# Altium PCB SensorBoard_PCB.PcbDoc (part 2 of 2)
Units mm, origin at the board's own origin, x right, y up, seen from the top; angles counter-clockwise.
Board outline 30.45 x 31.34 mm, 4 copper layers (Top Layer, GND, 3.3V, Bottom Layer), stack 1.561 mm thick; 41 components, 34 nets, 218 pads, 43 vias.
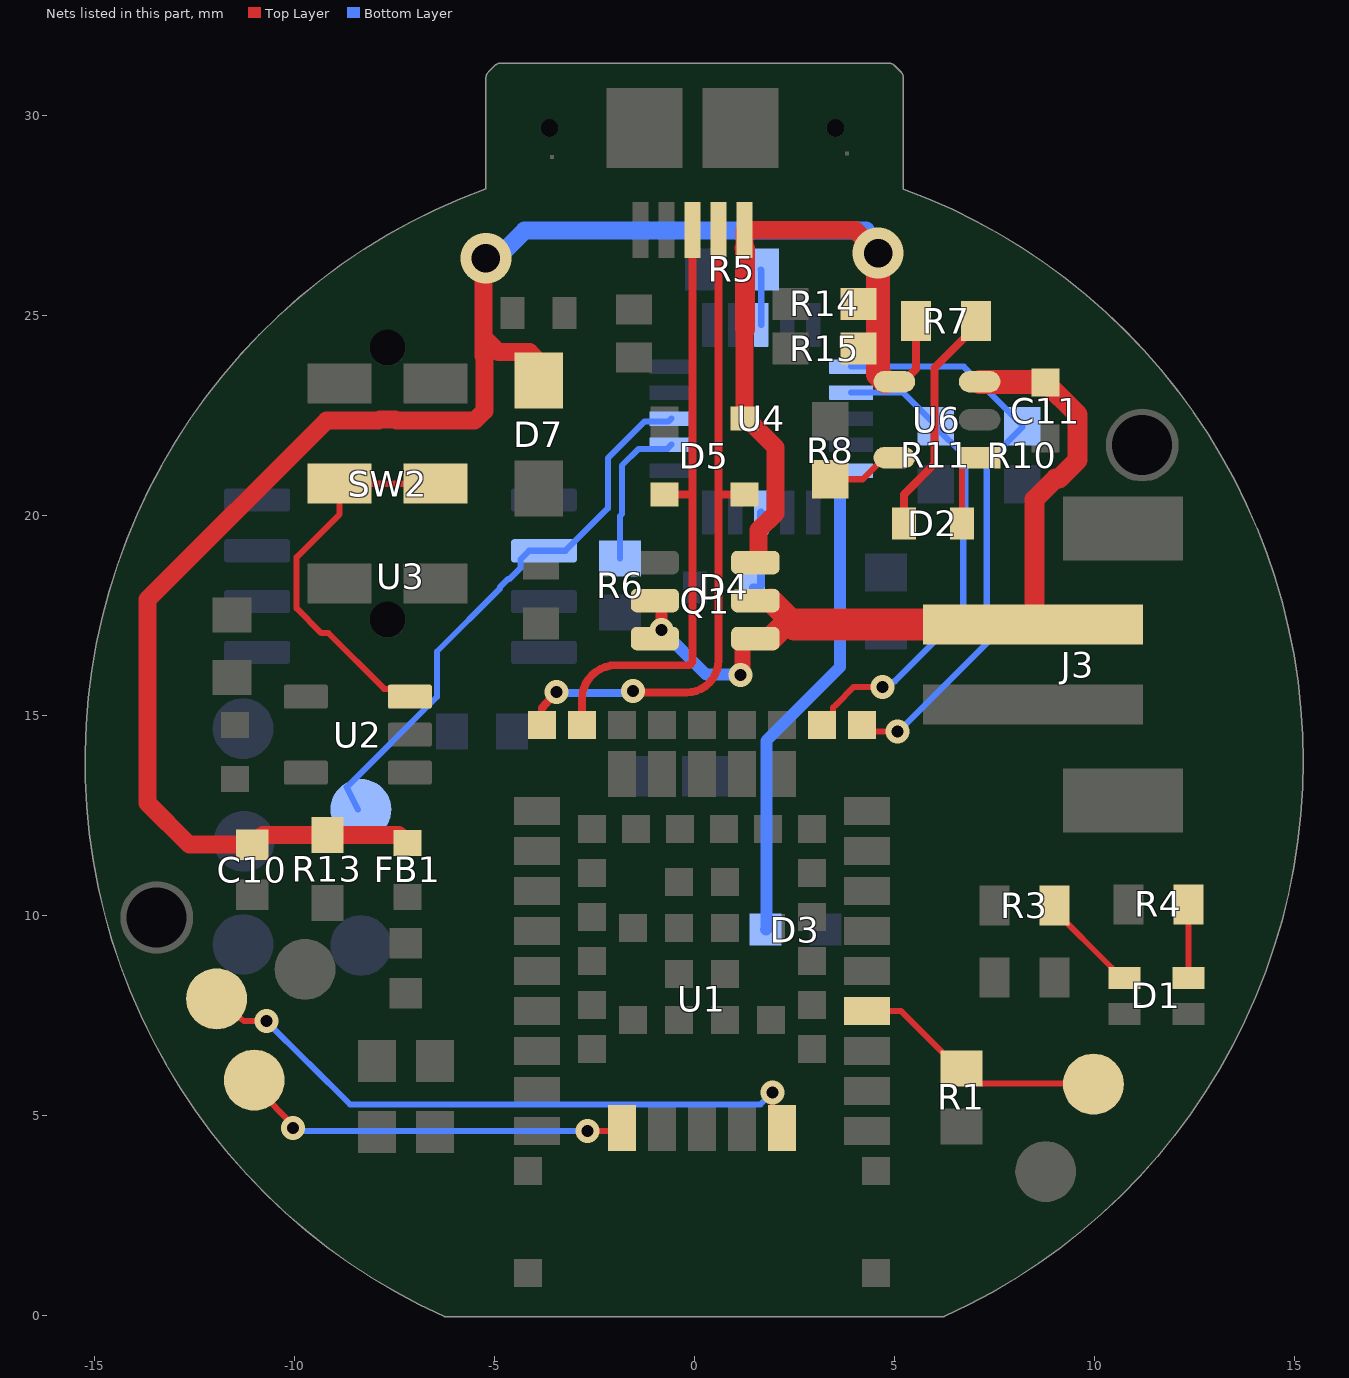
[diagram p4: the nets of this part, all layers, seen from the top]

## Via types
v1: diameter 0.6, hole 0.3, Top Layer to Bottom Layer, tented both sides, 36 vias
v2: diameter 1.27, hole 0.711, Top Layer to Bottom Layer, tented both sides, 4 vias
v3: diameter 0.6, hole 0.3, Top Layer to Bottom Layer, tented top, 3 vias

## Nets (pads, with @x,y where several pads share a name; then routed paths per layer and width w, separated by ;. In a path a pad name is that pad's centre, name@x,y a point inside that pad or via, vN(x,y) a via of type N, cw(c..) or ccw(c..) an arc to the next point about the centre after c; other vN are vias at no path point) (continued)
NetD1_2: D1.2 R3.1 | length 2.6
  Top Layer w0.152: R3.1@9.005,10.249 9.005,10.124 10.433,8.696 10.433,8.637 10.632,8.438 D1.2@10.757,8.438
NetD1_3: D1.3 R4.1 | length 1.8
  Top Layer w0.152: D1.3@12.357,8.438 R4.1@12.358,10.274
NetD2_1: D2.1 U6.1 | length 2
  Top Layer w0.152: D2.1@6.694,19.799 6.694,21.247 6.887,21.44 U6.1@7.137,21.44
NetD2_2: D2.2 R7.1 | length 5.8
  Top Layer w0.2: D2.2@5.244,19.799 5.244,20.522 6.009,21.287 6.009,23.689 7.049,24.729 R7.1@7.049,24.854
NetD3_2: D3.2 U4.15 | length 12.2
  Bottom Layer w0.3: D3.2@1.79,9.639 1.803,9.653 1.803,14.364 3.651,16.212 U4.15@3.651,21.116
NetD4_1: D4.1 U4.18 | length 2.1
  Bottom Layer w0.2: D4.1@1.473,18.199 1.524,18.199 1.575,18.148 1.673,18.247 1.673,19.058 1.676,19.061 U4.18@1.676,20.071
NetD6_1: 
NetR5_1: R5.1 U4.8 | length 1.4
  Bottom Layer w0.152: R5.1@1.665,26.149 1.676,26.138 U4.8@1.676,24.76
NetR6_2: R6.2 U4.2 | length 3.8
  Bottom Layer w0.152: R6.2@-1.854,18.925 -1.854,19.982 -1.804,20.032 -1.804,21.246 -1.389,21.662 -0.672,21.662 U4.2@-0.569,21.766
NetR8_2: R8.2 U6.5 | length 1.8
  Top Layer w0.152: R8.2@3.404,20.901 4.215,20.901 4.754,21.44 U6.5@5.004,21.44
NetSW2_2: SW2.2 U2.3 | length 9.7
  Top Layer w0.152: U2.3@-7.107,15.466 -7.303,15.662 -7.75,15.662 -9.142,17.054 -9.319,17.054 -9.941,17.676 -9.941,18.952 -8.865,20.028 SW2.2@-8.865,20.79 SW2.2@-6.465,20.79
RESETN: pad.6@9.982,5.779 R1.1 U1.19 | length 6.4
  Top Layer w0.152: U1.19@4.319,7.604 5.175,7.604 6.605,6.173 R1.1@6.68,6.173 7.054,5.8 9.961,5.8 pad.6@9.982,5.779
SCK: pad.1@-8.331,12.647 U3.6 U4.3 | length 14.1
  Bottom Layer w0.152: pad.1@-8.405,12.647 -8.687,13.205 -6.429,15.462 -6.429,16.596 -4.857,18.168 -4.857,18.205 -4.653,18.41 -4.615,18.41 -4.341,18.684 -4.341,18.9 -4.127,19.114 -3.221,19.114 -2.157,20.178 -2.157,21.427 -1.238,22.346 -0.638,22.346 U4.3@-0.569,22.416
SCL: R10.1 U1.47 U4.11 | length 14.8
  Top Layer w0.152: U1.47@4.194,14.754 4.355,14.592 v1(5.089,14.592)
  Bottom Layer w0.152: U4.11@3.921,23.716 6.74,23.716 8.204,22.251 R10.1@8.204,22.228 8.204,22.205 7.315,21.316 7.315,16.802 5.105,14.592 v1(5.089,14.592)
SDA: R11.1 U1.48 U4.12 | length 12.3
  Top Layer w0.152: U1.48@3.194,14.754 3.468,15.028 3.468,15.19 3.547,15.269 3.988,15.71 v1(4.712,15.71)
  Bottom Layer w0.152: U4.12@3.921,23.066 5.231,23.066 6.045,22.251 R11.1@6.045,22.228 6.045,22.205 6.727,21.523 6.727,21.418 6.777,21.368 6.777,20.181 6.727,20.131 6.727,17.561 5.016,15.849 4.972,15.849 4.833,15.71 v1(4.712,15.71)
SWCLK: pad.3@-10.998,5.88 U1.11 | length 10.1
  Top Layer w0.152: pad.3@-10.998,5.88 -10.795,5.956 -10.795,5.595 ccw(c-10.643,5.595) -10.75,5.487 -10.168,4.905 cw(c-10.276,4.797) -10.126,4.825 -10.121,4.797 ccw(c-9.971,4.825) v1(-10.033,4.686) ; v3(-2.667,4.61) -1.875,4.61 U1.11@-1.806,4.679
  Bottom Layer w0.152: v1(-10.033,4.686) -9.957,4.61 v3(-2.667,4.61)
SWDIO: pad.2@-11.938,7.912 U1.15 | length 16.1
  Top Layer w0.152: pad.2@-11.938,7.912 -11.252,7.353 v1(-10.693,7.353) ; v3(1.956,5.575) 1.956,4.917 U1.15@2.194,4.679
  Bottom Layer w0.152: v1(-10.693,7.353) -8.6,5.271 1.651,5.271 v3(1.956,5.575)
USB_N: D5.3 pad.2@0.606,27.13 U1.55 | length 16.9
  Top Layer w0.152: U1.55@-3.81,14.754 U1.55@-3.806,14.754
  Top Layer w0.198: U1.55@-3.81,14.754 -3.81,15.177 v1(-3.443,15.588) ; v1(-1.526,15.604) -1.492,15.57 -0.196,15.57 ccw(c-0.196,16.37) 0.605,16.37 pad.2@0.606,27.13
  Top Layer w0.199: 0.606,20.526 D5.3@1.254,20.526
  Bottom Layer w0.198: v1(-3.443,15.588) -3.391,15.559 ccw(c-3.374,15.583) -3.374,15.554 -1.576,15.554 v1(-1.526,15.604)
USB_P: D5.2 pad.3@-0.044,27.13 U1.54 | length 15.4
  Top Layer w0.198: U1.54@-2.806,14.754 -2.806,15.401 cw(c-1.955,15.401) -1.955,16.252 -0.162,16.252 ccw(c-0.162,16.37) -0.044,16.37 pad.3@-0.044,27.13
  Top Layer w0.199: D5.2@-0.746,20.526 -0.044,20.526
VBAT: C11.2 J3.1 Q1.1 Q1.2 Q1.5 Q1.6 U6.3 | length 20.9
  Top Layer w0.3: Q1.5@-0.899,17.869 -0.813,17.782 v1(-0.813,17.132)
  Top Layer w0.4: v1(1.158,16.013) 1.206,16.157 1.206,16.824 1.301,16.919 1.611,16.919 Q1.1@1.921,16.919 ; 2.27,17.269 2.521,17.269 ; U6.3@7.137,23.34 U6.3@7.148,23.329 ; 9.588,22.022 9.588,22.072
  Top Layer w0.5: J3.1@8.469,17.269 8.509,17.309 8.509,20.395 9.032,20.919 9.125,20.919 9.588,21.382 9.588,22.022 9.588,22.519 C11.2@8.778,23.329
  Top Layer w0.6: Q1.1@1.921,16.919 2.27,17.269 ; Q1.2@1.921,17.869 2.521,17.269 ; U6.3@7.148,23.329 C11.2@8.778,23.329
  Top Layer w0.8: 2.521,17.269 7.849,17.269 J3.1@8.469,17.269
  Bottom Layer w0.3: v1(-0.813,17.132) 0.305,16.015 1.118,16.015 v1(1.158,16.013)
VBUS: C10.1 D5.4 D7.2 FB1.1 pad.1@1.256,27.13 Q1.3 R7.2 R13.2 R14.1 R15.1 U6.4 | length 55.6
  Top Layer w0.2: U6.4@5.231,23.34 5.549,23.659 R7.2@5.549,24.854
  Top Layer w0.45: FB1.1@-7.163,11.813 -7.188,11.813 -7.388,12.013 R13.2@-9.169,12.013 -10.774,12.013 -11.022,11.765 C10.1@-11.049,11.765 -12.621,11.765 -13.665,12.808 -13.665,17.894 -9.195,22.365 -7.889,22.365 -7.853,22.4 -7.476,22.4 -7.441,22.365 -5.489,22.365 -5.24,22.614 -5.24,23.966 -5.261,23.988 -5.261,24.452 ; v2(-5.207,26.429) -5.261,26.375 -5.261,24.452 ; D7.2@-3.886,23.847 -4.116,24.077 -4.887,24.077 -5.261,24.452 ; 1.254,24.548 D5.4@1.254,22.426 1.304,22.426 2.029,21.701 2.029,20.05 1.611,19.631 Q1.3@1.611,18.819 ; pad.1@1.256,26.68 pad.1@1.256,27.13 4.023,27.13 v2(4.597,26.556) ; U6.4@4.778,23.34 U6.4@5.004,23.34 U6.4@5.231,23.34
  Top Layer w0.5: pad.1@1.256,26.68 1.27,26.666 1.27,24.651
  Top Layer w0.6: v2(4.597,26.556) 4.597,23.521 U6.4@4.778,23.34
  Bottom Layer w0.45: v2@-5.131,26.226 -4.242,27.115 4.293,27.115
pads on no net: SW2. U1.2 U1.3 U1.4 U1.5 U1.7 U1.8 U1.13 U1.16 U1.17 U1.18 U1.23 U1.24 U1.27 U1.28 U1.29 U1.32 U1.33 U1.34 U1.35 U1.36 U1.37 U1.38 U1.39 U1.40 U1.41 U1.42 U1.43 U1.44 U1.45 U1.46 U1.49 U1.50 U1.51 U1.52 U4.1 U4.7 U4.9 U4.10 U4.13 U4.19 U4.20

## Polygon pours and split planes (outlines as drawn)
GND on GND "GND_L02_P010" (solid, pour order 10): -6.985,0.648 6.872,0.585 ccw(c0.093,14.137) 15.243,13.85 ccw(c-0.012,13.85) 5.247,28.17 5.247,30.922 ccw(c4.991,30.922) 5.172,31.103 5.024,31.251 ccw(c4.843,31.071) 4.844,31.326 -4.842,31.326 ccw(c-4.841,31.071) -5.022,31.251 -5.17,31.103 ccw(c-4.991,30.923) -5.245,30.922 -5.245,28.179 ccw(c-0.03,14.029)
3.3V on 3.3V "3.3V_L03_P012" (solid, pour order 12): -6.985,0.648 6.872,0.585 ccw(c0.093,14.137) 15.243,13.85 ccw(c-0.012,13.85) 5.247,28.17 5.247,30.922 ccw(c4.991,30.922) 5.172,31.103 5.024,31.251 ccw(c4.843,31.071) 4.844,31.326 -4.842,31.326 ccw(c-4.841,31.071) -5.022,31.251 -5.17,31.103 ccw(c-4.991,30.923) -5.245,30.922 -5.245,28.179 ccw(c-0.03,14.029)
GND on Top Layer "GND_L01_P009" (solid, remove dead copper, pour order 9): -6.973,0.653 6.552,0.592 ccw(c-0.568,14.511) 15.062,14.174 ccw(c-0.098,13.806) 5.259,27.993 5.259,30.928 ccw(c5.004,30.928) 5.184,31.108 5.036,31.257 ccw(c4.855,31.077) 4.856,31.332 -4.83,31.332 ccw(c-4.829,31.077) -5.01,31.257 -5.158,31.109 ccw(c-4.979,30.928) -5.233,30.928 -5.233,28.185 ccw(c-0.018,14.035)
GND on Bottom Layer "GND_L04_P013" (solid, remove dead copper, pour order 13): -6.985,0.648 6.872,0.585 ccw(c0.093,14.137) 15.243,13.85 ccw(c-0.012,13.85) 5.247,28.17 5.247,30.922 ccw(c4.991,30.922) 5.172,31.103 5.024,31.251 ccw(c4.843,31.071) 4.844,31.326 -4.842,31.326 ccw(c-4.841,31.071) -5.022,31.251 -5.17,31.103 ccw(c-4.991,30.923) -5.245,30.922 -5.245,28.179 ccw(c-0.03,14.029)

## Keep-outs
Keep-Out Layer:
  lines w0.1: -6.213,-0.037 ccw(c-6.214,0.064) -6.213,-0.037 ; -6.213,-0.037 cw(c-6.214,0.064) -6.214,-0.037 cw(c-6.214,0.064) -6.255,-0.028 cw(c0,13.856) -5.206,28.166 -5.206,30.928 cw(c-4.978,30.928) -5.14,31.088 ; -6.213,-0.037 6.214,-0.037 ; -5.14,31.088 ccw(c-5.068,31.019) -5.141,31.088 -5.14,31.088 ; -5.14,31.088 cw(c-5.068,31.019) -5.139,31.09 ; -5.14,31.089 ccw(c-4.978,30.928) -5.14,31.088 ; -5.14,31.089 ccw(c-5.103,31.054) -5.14,31.089 ; -5.14,31.089 cw(c-5.103,31.054) -5.139,31.09 ; -5.14,31.089 cw(c-5.104,31.053) -5.139,31.089 cw(c-5.104,31.053) -5.139,31.09 ; -5.14,31.089 ccw(c-5.104,31.053) -5.14,31.089 ; -5.14,31.089 ccw(c-4.978,30.928) -5.14,31.089 ; -5.14,31.089 cw(c-4.978,30.928) -5.139,31.09 ; -5.14,31.088 -5.139,31.09 ; -5.14,31.089 -5.14,31.089 ; -5.14,31.089 -5.14,31.089 ; -5.139,31.09 ccw(c-4.978,30.928) -5.139,31.09 ; -5.139,31.09 ccw(c-5.103,31.054) -5.139,31.09 ; -5.139,31.09 ccw(c-4.978,30.928) -5.139,31.09 ; -5.139,31.09 ccw(c-5.103,31.054) -5.139,31.09 ; -5.139,31.09 -5.139,31.09 ; -5.139,31.09 -5.139,31.09 ; -5.139,31.09 -5.139,31.09 ; -5.139,31.09 -4.991,31.238 ; -4.992,31.237 ccw(c-4.92,31.167) -4.992,31.237 ; -4.991,31.238 ccw(c-4.956,31.202) -4.991,31.237 ; -4.991,31.238 ccw(c-4.956,31.202) -4.991,31.237 ; -4.991,31.237 ccw(c-4.956,31.202) -4.992,31.237 ; -4.991,31.237 ccw(c-4.92,31.167) -4.992,31.237 ; -4.991,31.237 ccw(c-4.83,31.077) -4.991,31.237 ; -4.991,31.238 ccw(c-4.83,31.077) -4.991,31.237 ; -4.991,31.238 cw(c-4.83,31.077) -4.834,31.305 ; -4.992,31.237 -4.991,31.238 ; -4.992,31.237 -4.991,31.237 ; -4.991,31.237 -4.991,31.237 ; -4.834,31.305 cw(c-4.83,31.204) -4.83,31.305 ; -4.834,31.305 cw(c-4.83,31.077) -4.833,31.305 ; -4.834,31.305 -4.83,31.305 ; -4.832,31.305 ccw(c-4.832,31.254) -4.833,31.305 ; -4.832,31.305 cw(c-4.83,31.254) -4.83,31.305 ; -4.833,31.305 -4.833,31.305 ; -4.832,31.305 -4.832,31.305 ; -4.83,31.305 4.855,31.305 ; 4.855,31.305 ccw(c4.855,31.254) 4.855,31.305 ; 4.856,31.305 ccw(c4.855,31.076) 4.855,31.305 ; 4.856,31.305 ccw(c4.856,31.254) 4.856,31.305 ; 4.856,31.305 cw(c4.855,31.254) 4.857,31.305 ; 4.856,31.305 cw(c4.855,31.254) 4.857,31.305 ; 4.856,31.305 cw(c4.856,31.254) 4.856,31.305 ; 4.855,31.305 4.855,31.305 ; 4.855,31.305 4.855,31.305 ; 4.856,31.305 4.856,31.305 ; 4.856,31.305 ccw(c4.855,31.076) 4.856,31.305 ; 4.856,31.305 cw(c4.855,31.076) 5.015,31.239 ; 5.016,31.239 ccw(c4.855,31.076) 5.015,31.239 ; 5.016,31.238 ccw(c4.98,31.203) 5.016,31.239 ; 5.016,31.238 ccw(c4.855,31.076) 5.016,31.239 ; 5.016,31.238 cw(c4.855,31.076) 5.017,31.238 ; 5.016,31.238 cw(c4.98,31.203) 5.016,31.238 cw(c4.98,31.203) 5.017,31.238 ; 5.016,31.238 ccw(c4.981,31.202) 5.016,31.238 ; 5.016,31.238 cw(c4.981,31.202) 5.017,31.238 ; 5.016,31.239 5.016,31.238 ; 5.017,31.237 ccw(c4.981,31.202) 5.017,31.238 ; 5.017,31.237 ccw(c4.981,31.202) 5.017,31.237 ; 5.017,31.237 ccw(c4.855,31.076) 5.017,31.237 ; 5.017,31.237 ccw(c4.855,31.076) 5.017,31.238 ; 5.017,31.237 5.017,31.237 ; 5.017,31.237 5.017,31.237 ; 5.017,31.238 5.017,31.238 ; 5.017,31.238 5.164,31.09 ; 5.164,31.09 ccw(c5.093,31.019) 5.164,31.09 ; 5.164,31.09 ccw(c5.129,31.054) 5.164,31.09 ; 5.164,31.09 ccw(c5.128,31.054) 5.164,31.09 ; 5.164,31.09 ccw(c5.005,30.929) 5.163,31.091 5.164,31.09 ; 5.164,31.09 ccw(c5.005,30.929) 5.164,31.09 ; 5.164,31.09 ccw(c5.005,30.929) 5.164,31.09 ; 5.164,31.09 ccw(c5.005,30.929) 5.164,31.09 ; 5.164,31.09 ccw(c5.005,30.929) 5.164,31.09 ; 5.164,31.09 ccw(c5.005,30.929) 5.164,31.09 ; 5.164,31.09 cw(c5.005,30.929) 5.232,30.93 ; 5.164,31.09 5.164,31.09 ; 5.164,31.09 5.164,31.09 ; 5.232,30.928 ccw(c5.131,30.928) 5.232,30.93 ; 5.232,30.928 ccw(c5.181,30.929) 5.232,30.929 ; 5.232,30.928 ccw(c5.181,30.929) 5.232,30.928 ; 5.232,30.928 ccw(c5.005,30.929) 5.232,30.929 ; 5.232,30.929 ccw(c5.005,30.929) 5.232,30.929 ; 5.232,30.928 ccw(c5.181,30.928) 5.232,30.929 ; 5.232,30.929 5.232,30.928 ; 5.232,30.928 5.232,28.157 cw(c0,13.856) 15.228,13.856 ; 5.232,30.93 ccw(c5.131,30.928) 5.232,30.93 ; 5.232,30.93 5.232,30.93 ; 6.214,-0.037 ccw(c6.214,0.063) 6.255,-0.028 ccw(c0,13.856) 15.228,13.856 ; 6.214,-0.037 ccw(c6.214,0.013) 6.214,-0.037 ; 6.214,-0.037 6.214,-0.037 ; 15.228,13.856 ccw(c15.127,13.856) 15.228,13.856 ; 15.228,13.856 ccw(c15.127,13.856) 15.228,13.856

## Other copper
Top Layer:
  pour cut-out: -3.81,0.584 -3.81,3.805 4.216,3.805 4.216,0.584
  region net NetC14_1: 3.503,28.756 3.476,28.758 3.448,28.761 3.421,28.766 3.395,28.773 3.368,28.781 3.342,28.79 3.317,28.8 3.292,28.812 3.268,28.825 3.245,28.84 3.222,28.855 3.2,28.872 3.179,28.89 3.159,28.909 3.14,28.929 3.123,28.95 3.106,28.971 3.09,28.994 3.076,29.017 3.063,29.042 3.051,29.066 3.04,29.092 3.031,29.118 3.024,29.144 3.017,29.171 3.012,29.198 3.008,29.225 3.006,29.252 3.006,29.28 3.006,29.68 3.306,29.68 3.306,29.28 3.306,29.268 3.307,29.256 3.308,29.245 3.311,29.233 3.313,29.222 3.317,29.21 3.321,29.199 3.325,29.188 3.33,29.178 3.336,29.167 3.342,29.157 3.349,29.148 3.356,29.138 3.363,29.129 3.372,29.121 3.38,29.113 3.389,29.105 3.398,29.098 3.408,29.091 3.418,29.085 3.428,29.079 3.439,29.074 3.45,29.07 3.461,29.066 3.472,29.063 3.484,29.06 3.495,29.058 3.507,29.056 3.519,29.055 3.531,29.055 3.542,29.055 3.554,29.056 3.566,29.058 3.577,29.06 3.589,29.063 3.6,29.066 3.611,29.07 3.622,29.074 3.633,29.079 3.643,29.085 3.653,29.091 3.663,29.098 3.672,29.105 3.681,29.113 3.69,29.121 3.698,29.129 3.705,29.138 3.713,29.148 3.719,29.157 3.725,29.167 3.731,29.178 3.736,29.188 3.741,29.199 3.745,29.21 3.748,29.222 3.751,29.233 3.753,29.245 3.754,29.256 3.755,29.268 3.756,29.28 3.756,29.68 4.056,29.68 4.056,29.28 4.055,29.252 4.053,29.225 4.049,29.198 4.044,29.171 4.038,29.144 4.03,29.118 4.021,29.092 4.01,29.066 3.998,29.042 3.985,29.017 3.971,28.994 3.955,28.971 3.939,28.95 3.921,28.929 3.902,28.909 3.882,28.89 3.861,28.872 3.839,28.855 3.817,28.84 3.793,28.825 3.769,28.812 3.744,28.8 3.719,28.79 3.693,28.781 3.666,28.773 3.64,28.766 3.613,28.761 3.585,28.758 3.558,28.756 3.531,28.755
  region net NetC14_1: 3.006,30.08 3.006,30.107 3.008,30.135 3.012,30.162 3.017,30.189 3.024,30.216 3.031,30.242 3.04,30.268 3.051,30.293 3.063,30.318 3.076,30.342 3.09,30.366 3.106,30.389 3.123,30.41 3.14,30.431 3.159,30.451 3.179,30.47 3.2,30.488 3.222,30.505 3.245,30.52 3.268,30.535 3.292,30.548 3.317,30.56 3.342,30.57 3.368,30.579 3.395,30.587 3.421,30.593 3.448,30.598 3.476,30.602 3.503,30.604 3.531,30.605 3.558,30.604 3.585,30.602 3.613,30.598 3.64,30.593 3.666,30.587 3.693,30.579 3.719,30.57 3.744,30.56 3.769,30.548 3.793,30.535 3.817,30.52 3.839,30.505 3.861,30.488 3.882,30.47 3.902,30.451 3.921,30.431 3.939,30.41 3.955,30.389 3.971,30.366 3.985,30.342 3.998,30.318 4.01,30.293 4.021,30.268 4.03,30.242 4.038,30.216 4.044,30.189 4.049,30.162 4.053,30.135 4.055,30.107 4.056,30.08 4.056,29.68 3.756,29.68 3.756,30.08 3.755,30.092 3.754,30.103 3.753,30.115 3.751,30.127 3.748,30.138 3.745,30.149 3.741,30.161 3.736,30.171 3.731,30.182 3.725,30.192 3.719,30.202 3.713,30.212 3.705,30.222 3.698,30.23 3.69,30.239 3.681,30.247 3.672,30.255 3.663,30.262 3.653,30.269 3.643,30.275 3.633,30.28 3.622,30.285 3.611,30.29 3.6,30.294 3.589,30.297 3.577,30.3 3.566,30.302 3.554,30.304 3.542,30.305 3.531,30.305 3.519,30.305 3.507,30.304 3.495,30.302 3.484,30.3 3.472,30.297 3.461,30.294 3.45,30.29 3.439,30.285 3.428,30.28 3.418,30.275 3.408,30.269 3.398,30.262 3.389,30.255 3.38,30.247 3.372,30.239 3.363,30.23 3.356,30.222 3.349,30.212 3.342,30.202 3.336,30.192 3.33,30.182 3.325,30.171 3.321,30.161 3.317,30.149 3.313,30.138 3.311,30.127 3.308,30.115 3.307,30.103 3.306,30.092 3.306,30.08 3.306,29.68 3.006,29.68
  region net NetC14_1: -3.647,28.756 -3.674,28.758 -3.702,28.761 -3.729,28.766 -3.755,28.773 -3.782,28.781 -3.808,28.79 -3.833,28.8 -3.858,28.812 -3.882,28.825 -3.905,28.84 -3.928,28.855 -3.95,28.872 -3.971,28.89 -3.991,28.909 -4.01,28.929 -4.027,28.95 -4.044,28.971 -4.06,28.994 -4.074,29.017 -4.087,29.042 -4.099,29.066 -4.11,29.092 -4.119,29.118 -4.126,29.144 -4.133,29.171 -4.138,29.198 -4.142,29.225 -4.144,29.252 -4.144,29.28 -4.144,29.68 -3.844,29.68 -3.844,29.28 -3.844,29.268 -3.843,29.256 -3.842,29.245 -3.839,29.233 -3.837,29.222 -3.833,29.21 -3.829,29.199 -3.825,29.188 -3.82,29.178 -3.814,29.167 -3.808,29.157 -3.801,29.148 -3.794,29.138 -3.787,29.129 -3.778,29.121 -3.77,29.113 -3.761,29.105 -3.752,29.098 -3.742,29.091 -3.732,29.085 -3.722,29.079 -3.711,29.074 -3.7,29.07 -3.689,29.066 -3.678,29.063 -3.666,29.06 -3.655,29.058 -3.643,29.056 -3.631,29.055 -3.619,29.055 -3.608,29.055 -3.596,29.056 -3.584,29.058 -3.573,29.06 -3.561,29.063 -3.55,29.066 -3.539,29.07 -3.528,29.074 -3.517,29.079 -3.507,29.085 -3.497,29.091 -3.487,29.098 -3.478,29.105 -3.469,29.113 -3.46,29.121 -3.452,29.129 -3.445,29.138 -3.437,29.148 -3.431,29.157 -3.425,29.167 -3.419,29.178 -3.414,29.188 -3.409,29.199 -3.405,29.21 -3.402,29.222 -3.399,29.233 -3.397,29.245 -3.396,29.256 -3.395,29.268 -3.394,29.28 -3.394,29.68 -3.094,29.68 -3.094,29.28 -3.095,29.252 -3.097,29.225 -3.101,29.198 -3.106,29.171 -3.112,29.144 -3.12,29.118 -3.129,29.092 -3.14,29.066 -3.152,29.042 -3.165,29.017 -3.179,28.994 -3.195,28.971 -3.211,28.95 -3.229,28.929 -3.248,28.909 -3.268,28.89 -3.289,28.872 -3.311,28.855 -3.333,28.84 -3.357,28.825 -3.381,28.812 -3.406,28.8 -3.431,28.79 -3.457,28.781 -3.484,28.773 -3.51,28.766 -3.537,28.761 -3.565,28.758 -3.592,28.756 -3.619,28.755
  region net NetC14_1: -4.144,30.08 -4.144,30.107 -4.142,30.135 -4.138,30.162 -4.133,30.189 -4.126,30.216 -4.119,30.242 -4.11,30.268 -4.099,30.293 -4.087,30.318 -4.074,30.342 -4.06,30.366 -4.044,30.389 -4.027,30.41 -4.01,30.431 -3.991,30.451 -3.971,30.47 -3.95,30.488 -3.928,30.505 -3.905,30.52 -3.882,30.535 -3.858,30.548 -3.833,30.56 -3.808,30.57 -3.782,30.579 -3.755,30.587 -3.729,30.593 -3.702,30.598 -3.674,30.602 -3.647,30.604 -3.619,30.605 -3.592,30.604 -3.565,30.602 -3.537,30.598 -3.51,30.593 -3.484,30.587 -3.457,30.579 -3.431,30.57 -3.406,30.56 -3.381,30.548 -3.357,30.535 -3.333,30.52 -3.311,30.505 -3.289,30.488 -3.268,30.47 -3.248,30.451 -3.229,30.431 -3.211,30.41 -3.195,30.389 -3.179,30.366 -3.165,30.342 -3.152,30.318 -3.14,30.293 -3.129,30.268 -3.12,30.242 -3.112,30.216 -3.106,30.189 -3.101,30.162 -3.097,30.135 -3.095,30.107 -3.094,30.08 -3.094,29.68 -3.394,29.68 -3.394,30.08 -3.395,30.092 -3.396,30.103 -3.397,30.115 -3.399,30.127 -3.402,30.138 -3.405,30.149 -3.409,30.161 -3.414,30.171 -3.419,30.182 -3.425,30.192 -3.431,30.202 -3.437,30.212 -3.445,30.222 -3.452,30.23 -3.46,30.239 -3.469,30.247 -3.478,30.255 -3.487,30.262 -3.497,30.269 -3.507,30.275 -3.517,30.28 -3.528,30.285 -3.539,30.29 -3.55,30.294 -3.561,30.297 -3.573,30.3 -3.584,30.302 -3.596,30.304 -3.608,30.305 -3.619,30.305 -3.631,30.305 -3.643,30.304 -3.655,30.302 -3.666,30.3 -3.678,30.297 -3.689,30.294 -3.7,30.29 -3.711,30.285 -3.722,30.28 -3.732,30.275 -3.742,30.269 -3.752,30.262 -3.761,30.255 -3.77,30.247 -3.778,30.239 -3.787,30.23 -3.794,30.222 -3.801,30.212 -3.808,30.202 -3.814,30.192 -3.82,30.182 -3.825,30.171 -3.829,30.161 -3.833,30.149 -3.837,30.138 -3.839,30.127 -3.842,30.115 -3.843,30.103 -3.844,30.092 -3.844,30.08 -3.844,29.68 -4.144,29.68
GND:
  pour cut-out: -3.81,0.705 -3.81,3.805 4.216,3.805 4.216,0.705
3.3V:
  pour cut-out: -3.81,0.705 -3.81,3.805 4.216,3.805 4.216,0.705
Bottom Layer:
  pour cut-out: -3.81,0.705 -3.81,3.805 4.216,3.805 4.216,0.705
  region net NetC14_1: 3.503,28.756 3.476,28.758 3.448,28.761 3.421,28.766 3.395,28.773 3.368,28.781 3.342,28.79 3.317,28.8 3.292,28.812 3.268,28.825 3.245,28.84 3.222,28.855 3.2,28.872 3.179,28.89 3.159,28.909 3.14,28.929 3.123,28.95 3.106,28.971 3.09,28.994 3.076,29.017 3.063,29.042 3.051,29.066 3.04,29.092 3.031,29.118 3.024,29.144 3.017,29.171 3.012,29.198 3.008,29.225 3.006,29.252 3.006,29.28 3.006,29.68 3.306,29.68 3.306,29.28 3.306,29.268 3.307,29.256 3.308,29.245 3.311,29.233 3.313,29.222 3.317,29.21 3.321,29.199 3.325,29.188 3.33,29.178 3.336,29.167 3.342,29.157 3.349,29.148 3.356,29.138 3.363,29.129 3.372,29.121 3.38,29.113 3.389,29.105 3.398,29.098 3.408,29.091 3.418,29.085 3.428,29.079 3.439,29.074 3.45,29.07 3.461,29.066 3.472,29.063 3.484,29.06 3.495,29.058 3.507,29.056 3.519,29.055 3.531,29.055 3.542,29.055 3.554,29.056 3.566,29.058 3.577,29.06 3.589,29.063 3.6,29.066 3.611,29.07 3.622,29.074 3.633,29.079 3.643,29.085 3.653,29.091 3.663,29.098 3.672,29.105 3.681,29.113 3.69,29.121 3.698,29.129 3.705,29.138 3.713,29.148 3.719,29.157 3.725,29.167 3.731,29.178 3.736,29.188 3.741,29.199 3.745,29.21 3.748,29.222 3.751,29.233 3.753,29.245 3.754,29.256 3.755,29.268 3.756,29.28 3.756,29.68 4.056,29.68 4.056,29.28 4.055,29.252 4.053,29.225 4.049,29.198 4.044,29.171 4.038,29.144 4.03,29.118 4.021,29.092 4.01,29.066 3.998,29.042 3.985,29.017 3.971,28.994 3.955,28.971 3.939,28.95 3.921,28.929 3.902,28.909 3.882,28.89 3.861,28.872 3.839,28.855 3.817,28.84 3.793,28.825 3.769,28.812 3.744,28.8 3.719,28.79 3.693,28.781 3.666,28.773 3.64,28.766 3.613,28.761 3.585,28.758 3.558,28.756 3.531,28.755
  region net NetC14_1: 3.006,30.08 3.006,30.107 3.008,30.135 3.012,30.162 3.017,30.189 3.024,30.216 3.031,30.242 3.04,30.268 3.051,30.293 3.063,30.318 3.076,30.342 3.09,30.366 3.106,30.389 3.123,30.41 3.14,30.431 3.159,30.451 3.179,30.47 3.2,30.488 3.222,30.505 3.245,30.52 3.268,30.535 3.292,30.548 3.317,30.56 3.342,30.57 3.368,30.579 3.395,30.587 3.421,30.593 3.448,30.598 3.476,30.602 3.503,30.604 3.531,30.605 3.558,30.604 3.585,30.602 3.613,30.598 3.64,30.593 3.666,30.587 3.693,30.579 3.719,30.57 3.744,30.56 3.769,30.548 3.793,30.535 3.817,30.52 3.839,30.505 3.861,30.488 3.882,30.47 3.902,30.451 3.921,30.431 3.939,30.41 3.955,30.389 3.971,30.366 3.985,30.342 3.998,30.318 4.01,30.293 4.021,30.268 4.03,30.242 4.038,30.216 4.044,30.189 4.049,30.162 4.053,30.135 4.055,30.107 4.056,30.08 4.056,29.68 3.756,29.68 3.756,30.08 3.755,30.092 3.754,30.103 3.753,30.115 3.751,30.127 3.748,30.138 3.745,30.149 3.741,30.161 3.736,30.171 3.731,30.182 3.725,30.192 3.719,30.202 3.713,30.212 3.705,30.222 3.698,30.23 3.69,30.239 3.681,30.247 3.672,30.255 3.663,30.262 3.653,30.269 3.643,30.275 3.633,30.28 3.622,30.285 3.611,30.29 3.6,30.294 3.589,30.297 3.577,30.3 3.566,30.302 3.554,30.304 3.542,30.305 3.531,30.305 3.519,30.305 3.507,30.304 3.495,30.302 3.484,30.3 3.472,30.297 3.461,30.294 3.45,30.29 3.439,30.285 3.428,30.28 3.418,30.275 3.408,30.269 3.398,30.262 3.389,30.255 3.38,30.247 3.372,30.239 3.363,30.23 3.356,30.222 3.349,30.212 3.342,30.202 3.336,30.192 3.33,30.182 3.325,30.171 3.321,30.161 3.317,30.149 3.313,30.138 3.311,30.127 3.308,30.115 3.307,30.103 3.306,30.092 3.306,30.08 3.306,29.68 3.006,29.68
  region net NetC14_1: -3.647,28.756 -3.674,28.758 -3.702,28.761 -3.729,28.766 -3.755,28.773 -3.782,28.781 -3.808,28.79 -3.833,28.8 -3.858,28.812 -3.882,28.825 -3.905,28.84 -3.928,28.855 -3.95,28.872 -3.971,28.89 -3.991,28.909 -4.01,28.929 -4.027,28.95 -4.044,28.971 -4.06,28.994 -4.074,29.017 -4.087,29.042 -4.099,29.066 -4.11,29.092 -4.119,29.118 -4.126,29.144 -4.133,29.171 -4.138,29.198 -4.142,29.225 -4.144,29.252 -4.144,29.28 -4.144,29.68 -3.844,29.68 -3.844,29.28 -3.844,29.268 -3.843,29.256 -3.842,29.245 -3.839,29.233 -3.837,29.222 -3.833,29.21 -3.829,29.199 -3.825,29.188 -3.82,29.178 -3.814,29.167 -3.808,29.157 -3.801,29.148 -3.794,29.138 -3.787,29.129 -3.778,29.121 -3.77,29.113 -3.761,29.105 -3.752,29.098 -3.742,29.091 -3.732,29.085 -3.722,29.079 -3.711,29.074 -3.7,29.07 -3.689,29.066 -3.678,29.063 -3.666,29.06 -3.655,29.058 -3.643,29.056 -3.631,29.055 -3.619,29.055 -3.608,29.055 -3.596,29.056 -3.584,29.058 -3.573,29.06 -3.561,29.063 -3.55,29.066 -3.539,29.07 -3.528,29.074 -3.517,29.079 -3.507,29.085 -3.497,29.091 -3.487,29.098 -3.478,29.105 -3.469,29.113 -3.46,29.121 -3.452,29.129 -3.445,29.138 -3.437,29.148 -3.431,29.157 -3.425,29.167 -3.419,29.178 -3.414,29.188 -3.409,29.199 -3.405,29.21 -3.402,29.222 -3.399,29.233 -3.397,29.245 -3.396,29.256 -3.395,29.268 -3.394,29.28 -3.394,29.68 -3.094,29.68 -3.094,29.28 -3.095,29.252 -3.097,29.225 -3.101,29.198 -3.106,29.171 -3.112,29.144 -3.12,29.118 -3.129,29.092 -3.14,29.066 -3.152,29.042 -3.165,29.017 -3.179,28.994 -3.195,28.971 -3.211,28.95 -3.229,28.929 -3.248,28.909 -3.268,28.89 -3.289,28.872 -3.311,28.855 -3.333,28.84 -3.357,28.825 -3.381,28.812 -3.406,28.8 -3.431,28.79 -3.457,28.781 -3.484,28.773 -3.51,28.766 -3.537,28.761 -3.565,28.758 -3.592,28.756 -3.619,28.755
  region net NetC14_1: -4.144,30.08 -4.144,30.107 -4.142,30.135 -4.138,30.162 -4.133,30.189 -4.126,30.216 -4.119,30.242 -4.11,30.268 -4.099,30.293 -4.087,30.318 -4.074,30.342 -4.06,30.366 -4.044,30.389 -4.027,30.41 -4.01,30.431 -3.991,30.451 -3.971,30.47 -3.95,30.488 -3.928,30.505 -3.905,30.52 -3.882,30.535 -3.858,30.548 -3.833,30.56 -3.808,30.57 -3.782,30.579 -3.755,30.587 -3.729,30.593 -3.702,30.598 -3.674,30.602 -3.647,30.604 -3.619,30.605 -3.592,30.604 -3.565,30.602 -3.537,30.598 -3.51,30.593 -3.484,30.587 -3.457,30.579 -3.431,30.57 -3.406,30.56 -3.381,30.548 -3.357,30.535 -3.333,30.52 -3.311,30.505 -3.289,30.488 -3.268,30.47 -3.248,30.451 -3.229,30.431 -3.211,30.41 -3.195,30.389 -3.179,30.366 -3.165,30.342 -3.152,30.318 -3.14,30.293 -3.129,30.268 -3.12,30.242 -3.112,30.216 -3.106,30.189 -3.101,30.162 -3.097,30.135 -3.095,30.107 -3.094,30.08 -3.094,29.68 -3.394,29.68 -3.394,30.08 -3.395,30.092 -3.396,30.103 -3.397,30.115 -3.399,30.127 -3.402,30.138 -3.405,30.149 -3.409,30.161 -3.414,30.171 -3.419,30.182 -3.425,30.192 -3.431,30.202 -3.437,30.212 -3.445,30.222 -3.452,30.23 -3.46,30.239 -3.469,30.247 -3.478,30.255 -3.487,30.262 -3.497,30.269 -3.507,30.275 -3.517,30.28 -3.528,30.285 -3.539,30.29 -3.55,30.294 -3.561,30.297 -3.573,30.3 -3.584,30.302 -3.596,30.304 -3.608,30.305 -3.619,30.305 -3.631,30.305 -3.643,30.304 -3.655,30.302 -3.666,30.3 -3.678,30.297 -3.689,30.294 -3.7,30.29 -3.711,30.285 -3.722,30.28 -3.732,30.275 -3.742,30.269 -3.752,30.262 -3.761,30.255 -3.77,30.247 -3.778,30.239 -3.787,30.23 -3.794,30.222 -3.801,30.212 -3.808,30.202 -3.814,30.192 -3.82,30.182 -3.825,30.171 -3.829,30.161 -3.833,30.149 -3.837,30.138 -3.839,30.127 -3.842,30.115 -3.843,30.103 -3.844,30.092 -3.844,30.08 -3.844,29.68 -4.144,29.68

## Silkscreen, mask and mechanical layers (free items; w line width, h text height)
Bottom Overlay:
  text "pIRfusiX" at 10.211,17.983 h1.52 r90
Top Paste:
  drawing of 4 lines, arcs and shapes, not listed
Bottom Paste:
  drawing of 4 lines, arcs and shapes, not listed
Top Solder:
  region: 2.806,30.832 4.262,30.832 4.262,28.53 2.806,28.53
  region: -4.344,30.832 -2.899,30.832 -2.899,28.53 -4.344,28.53
Bottom Solder:
  region: 2.806,30.832 4.262,30.832 4.262,28.53 2.806,28.53
  region: -4.344,30.832 -2.9,30.832 -2.9,28.53 -4.344,28.53
Mechanical 1:
  lines w0: -3.844,29.28 ccw(c-3.619,29.28) -3.619,29.055 ccw(c-3.619,29.28) -3.394,29.28 -3.394,30.08 ccw(c-3.619,30.08) -3.619,30.305 ccw(c-3.619,30.08) -3.844,30.08 -3.844,29.28 ; 3.306,29.28 ccw(c3.531,29.28) 3.531,29.055 ccw(c3.531,29.28) 3.756,29.28 3.756,30.08 ccw(c3.531,30.08) 3.531,30.305 ccw(c3.531,30.08) 3.306,30.08 3.306,29.28
Mechanical 13:
  lines w0.1: -3.744,26.905 3.656,26.905 3.656,32.455 -3.744,32.455 -3.744,26.905
  lines w0.2: -6.044,31.13 5.956,31.13
Mechanical 15:
  lines w0.05: -4.544,26.17 4.456,26.18 4.456,32.68 -4.544,32.68 -4.544,26.17
  lines w0.1: -0.552,29.68 0.464,29.68 ; -0.044,29.172 -0.044,30.188